# EAGLE board FT232RL (EAGLE 5.00)
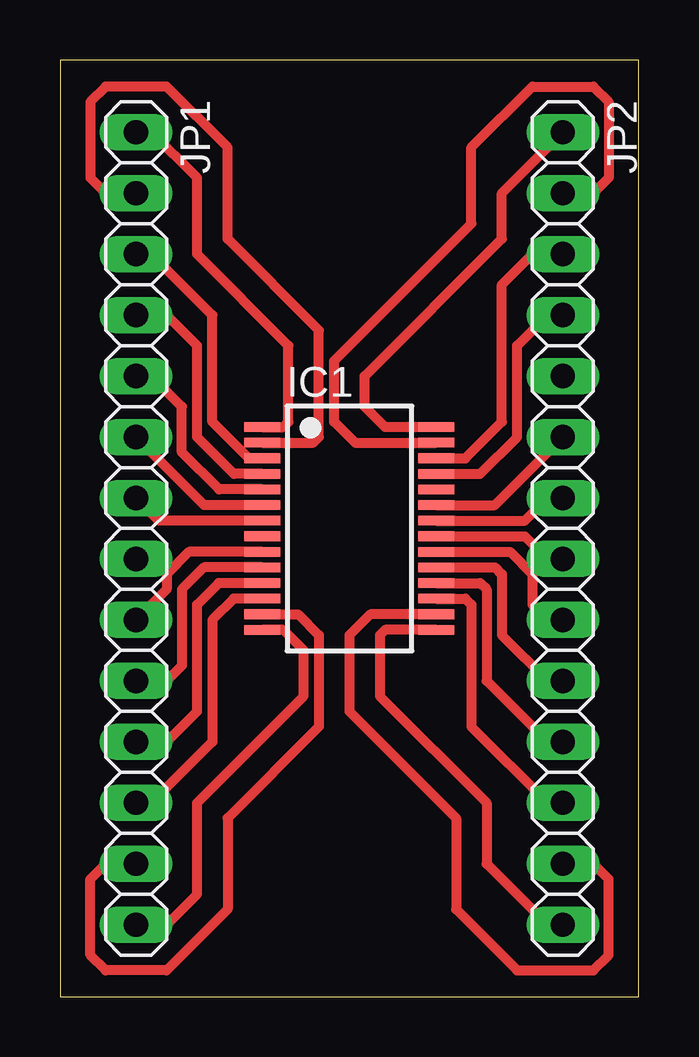
[diagram p0: board, top side]

Size 24.12 x 39.04 mm. Coordinates in mm from the lower left corner, seen from the top.
Outline: 0,39.04 0,0 24.12,0 24.12,39.04 0,39.04
Copper layers (1*16): Top 0.035mm / dielectric 1.5mm / Bottom 0.035mm
Design rules "default": minimum track width 10mil, minimum drill 24mil, track to track 8mil, track to pad 8mil, pad to pad 8mil, via to via 8mil, smd to smd 8mil, copper to edge 40mil, drill to drill 8mil, minimum pad ring 10mil, minimum via ring 8mil, stop-mask expansion 4mil, vias tented up to drill 0mil, thermal gap 10mil

## Footprints (pad centres in the part's own frame; a part is rotated, then mirrored left to right if it is on the bottom)
SSOP28 = smd 0.4 x 1.5: 1 -4.225,-3.625; 2 -3.575,-3.625; 3 -2.925,-3.625; 4 -2.275,-3.625; 5 -1.625,-3.625; 6 -0.975,-3.625; 7 -0.325,-3.625; 8 0.325,-3.625; 9 0.975,-3.625; 10 1.625,-3.625; 11 2.275,-3.625; 12 2.925,-3.625; 13 3.575,-3.625; 14 4.225,-3.625; 15 4.225,3.625; 16 3.575,3.625; 17 2.925,3.625; 18 2.275,3.625; 19 1.625,3.625; 20 0.975,3.625; 21 0.325,3.625; 22 -0.325,3.625; 23 -0.975,3.625; 24 -1.625,3.625; 25 -2.275,3.625; 26 -2.925,3.625; 27 -3.575,3.625; 28 -4.225,3.625
1X14 = drill 1.016 long: 1 -16.51,0; 2 -13.97,0; 3 -11.43,0; 4 -8.89,0; 5 -6.35,0; 6 -3.81,0; 7 -1.27,0; 8 1.27,0; 9 3.81,0; 10 6.35,0; 11 8.89,0; 12 11.43,0; 13 13.97,0; 14 16.51,0

## Placement (x,y rotation side)
IC1  FT232RL  [SSOP28]  12.06,19.52 270 top
JP1  [1X14]  3.17,19.52 270 top
JP2  [1X14]  20.95,19.52 270 top

## Library data of the parts
IC1 = ftdichip
JP1 JP2 = pinhead

## Nets
N$1: IC1.12 JP1.12
N$2: IC1.1 JP1.1
N$3: IC1.2 JP1.2
N$4: IC1.3 JP1.3
N$5: IC1.4 JP1.4
N$6: IC1.5 JP1.5
N$7: IC1.6 JP1.6
N$8: IC1.7 JP1.7
N$9: IC1.9 JP1.9
N$10: IC1.10 JP1.10
N$11: IC1.11 JP1.11
N$12: IC1.14 JP1.14
N$13: IC1.13 JP1.13
N$14: IC1.22 JP2.7
N$15: IC1.28 JP2.1
N$16: IC1.27 JP2.2
N$17: IC1.26 JP2.3
N$18: IC1.25 JP2.4
N$19: IC1.23 JP2.6
N$20: IC1.21 JP2.8
N$21: IC1.20 JP2.9
N$22: IC1.19 JP2.10
N$23: IC1.18 JP2.11
N$24: IC1.17 JP2.12
N$25: IC1.16 JP2.13
N$28: IC1.15 JP2.14

## Tracks (layer width: path | path; a pad name or v marks a point on that pad's centre or on a via)
N$1
  Top 0.406: IC1.12 7.23,16.59 6.34,15.71 6.34,10.63 3.8,8.09 JP1.12
N$2
  Top 0.406: IC1.1 9.3,23.75 9.52,23.96 9.52,27.14 5.71,30.95 5.71,34.12 3.8,36.03 JP1.1
N$3
  Top 0.406: IC1.2 10.55,23.09 10.79,23.33 10.79,27.77 6.98,31.58 6.98,35.39 4.44,37.94 1.9,37.94 1.27,37.3 1.27,34.12 1.9,33.49 JP1.2
N$4
  Top 0.406: IC1.3 7.86,22.45 6.34,23.96 6.34,28.41 3.8,30.95 JP1.3
N$5
  Top 0.406: IC1.4 7.25,21.8 5.71,23.33 5.71,27.14 4.44,28.41 JP1.4
N$6
  Top 0.406: IC1.5 6.62,21.14 5.07,22.7 5.07,24.6 3.8,25.87 JP1.5
N$7
  Top 0.406: IC1.6 6,20.5 JP1.6
N$8
  Top 0.406: IC1.7 4.11,19.84 JP1.7
N$9
  Top 0.406: IC1.9 5.37,18.55 4.44,17.61 4.44,16.98 JP1.9
N$10
  Top 0.406: IC1.10 5.99,17.89 5.07,16.98 5.07,13.8 4.44,13.17 JP1.10
N$11
  Top 0.406: JP1.11 4.44,10.63 5.71,11.9 5.71,16.34 6.61,17.25 IC1.11
N$12
  Top 0.406: IC1.14 9.3,15.3 10.16,14.44 10.16,12.54 5.71,8.09 5.71,4.28 4.44,3.01 JP1.14
N$13
  Top 0.406: IC1.13 9.92,15.95 10.79,15.07 10.79,11.27 6.98,7.46 6.98,3.65 4.44,1.11 1.9,1.11 1.27,1.74 1.27,4.92 1.9,5.55 JP1.13
N$14
  Top 0.406: IC1.22 19.37,19.84 20.31,20.79 JP2.7
N$15
  Top 0.406: IC1.28 13.55,23.75 12.7,24.6 12.7,25.87 18.41,31.58 18.41,33.49 JP2.1
N$16
  Top 0.406: IC1.27 12.3,23.09 11.42,23.96 11.42,26.5 17.14,32.22 17.14,35.39 19.68,37.94 22.22,37.94 22.85,37.3 22.85,34.12 22.22,33.49 JP2.2
N$17
  Top 0.406: IC1.26 16.89,22.45 18.41,23.96 18.41,29.68 19.68,30.95 JP2.3
N$18
  Top 0.406: IC1.25 17.51,21.8 19.05,23.33 19.05,27.14 20.31,28.41 JP2.4
N$19
  Top 0.406: IC1.23 18.12,20.5 JP2.6
N$20
  Top 0.406: IC1.21 19.37,19.2 20.31,18.25 JP2.8
N$21
  Top 0.406: IC1.20 18.75,18.55 19.68,17.61 19.68,16.34 20.31,15.71 JP2.9
N$22
  Top 0.406: IC1.19 18.13,17.89 18.41,17.61 18.41,15.07 20.31,13.17 JP2.10
N$23
  Top 0.406: IC1.18 17.51,17.25 17.77,16.98 17.77,13.17 20.31,10.63 JP2.11
N$24
  Top 0.406: JP2.12 20.31,8.09 17.14,11.27 17.14,16.34 16.89,16.59 IC1.17
N$25
  Top 0.406: IC1.16 12.93,15.95 12.06,15.07 12.06,11.9 16.51,7.46 16.51,3.65 19.05,1.11 22.22,1.11 22.85,1.74 22.85,4.92 22.22,5.55 JP2.13
N$28
  Top 0.406: IC1.15 13.55,15.3 13.33,15.07 13.33,12.54 17.77,8.09 17.77,5.55 20.31,3.01 JP2.14